# EAGLE board sampahSIM (EAGLE 7.1.0)
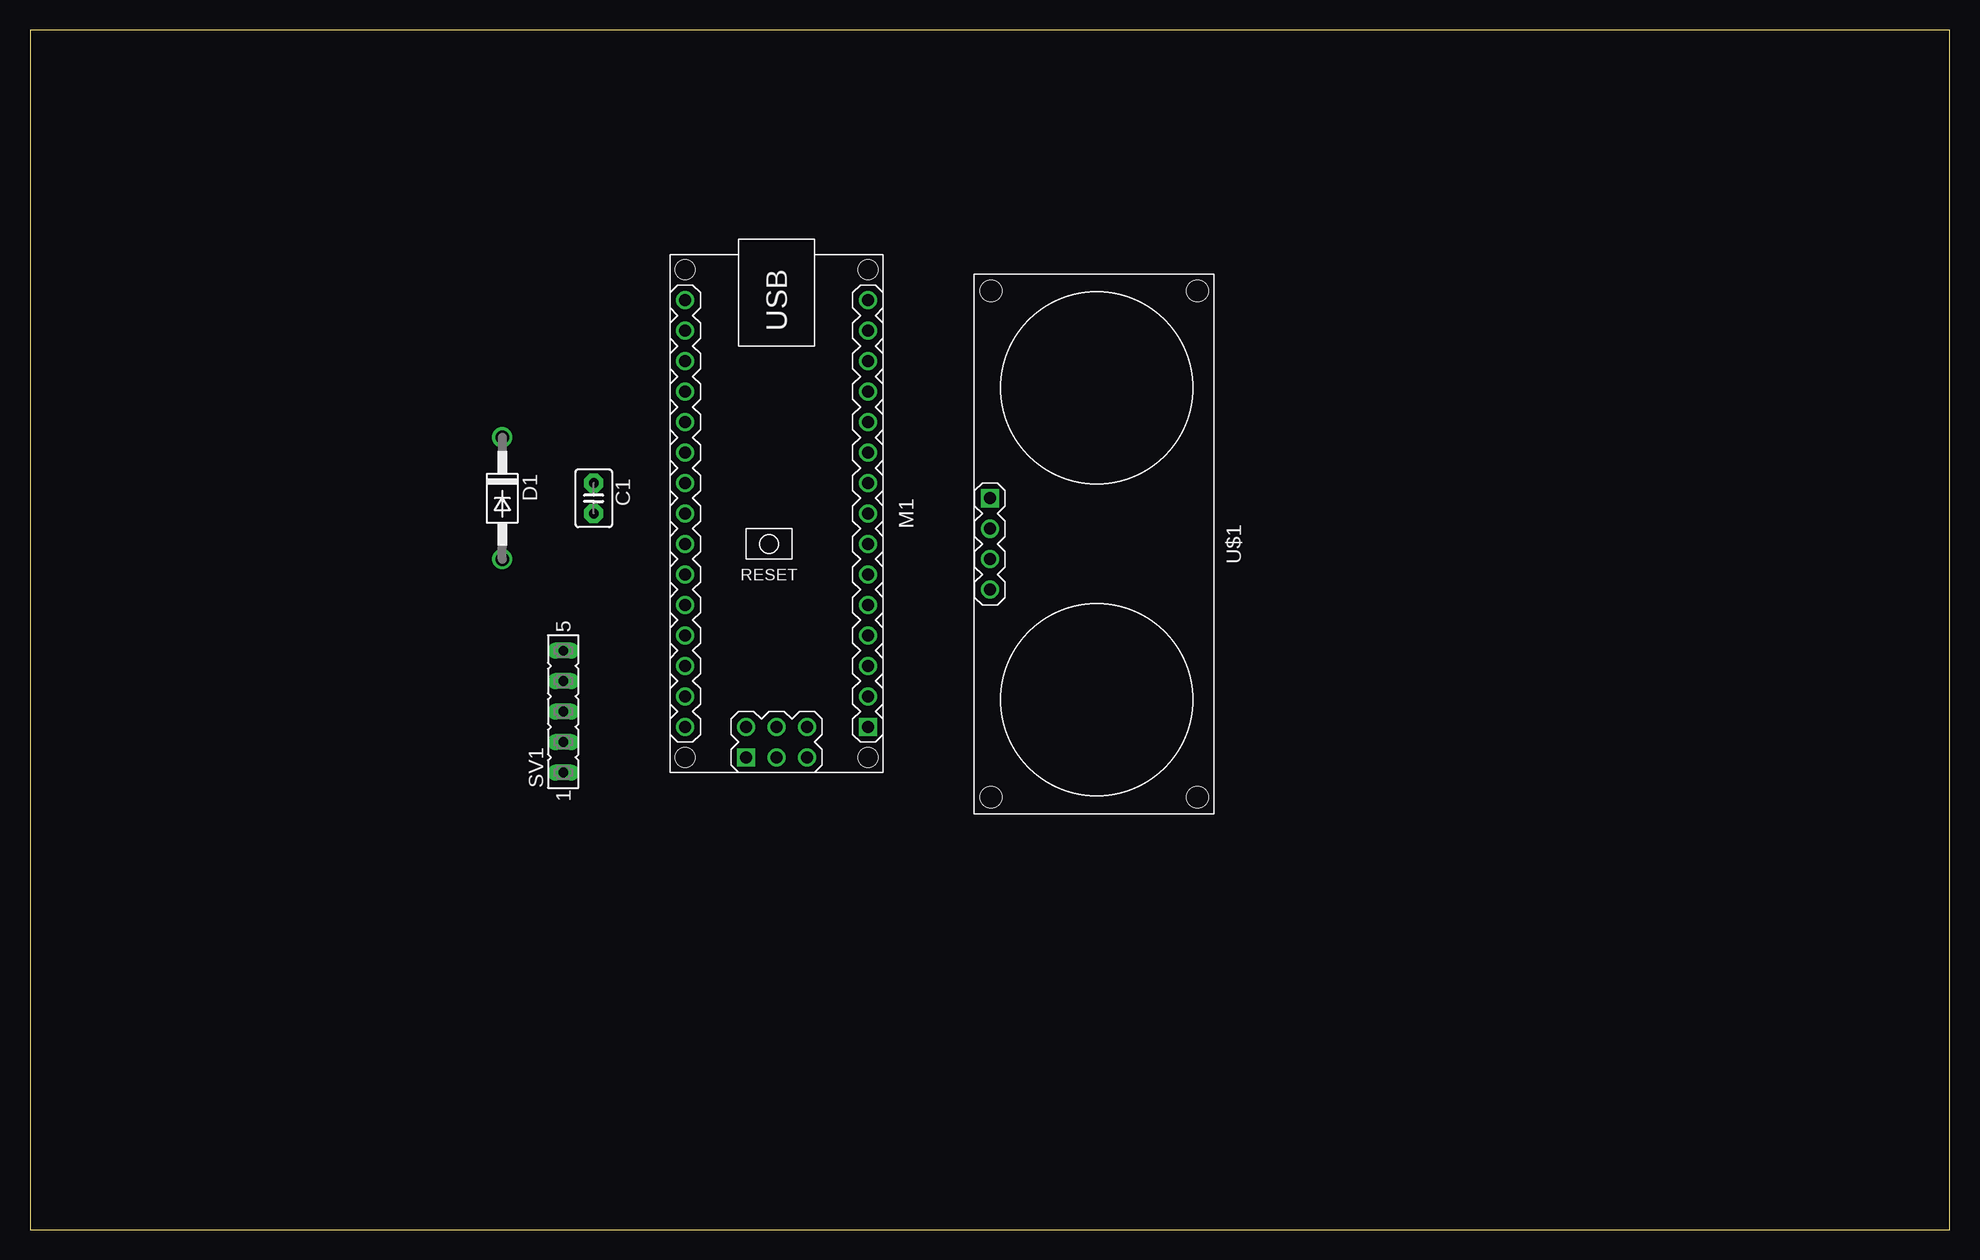
[diagram p0: board, top side]
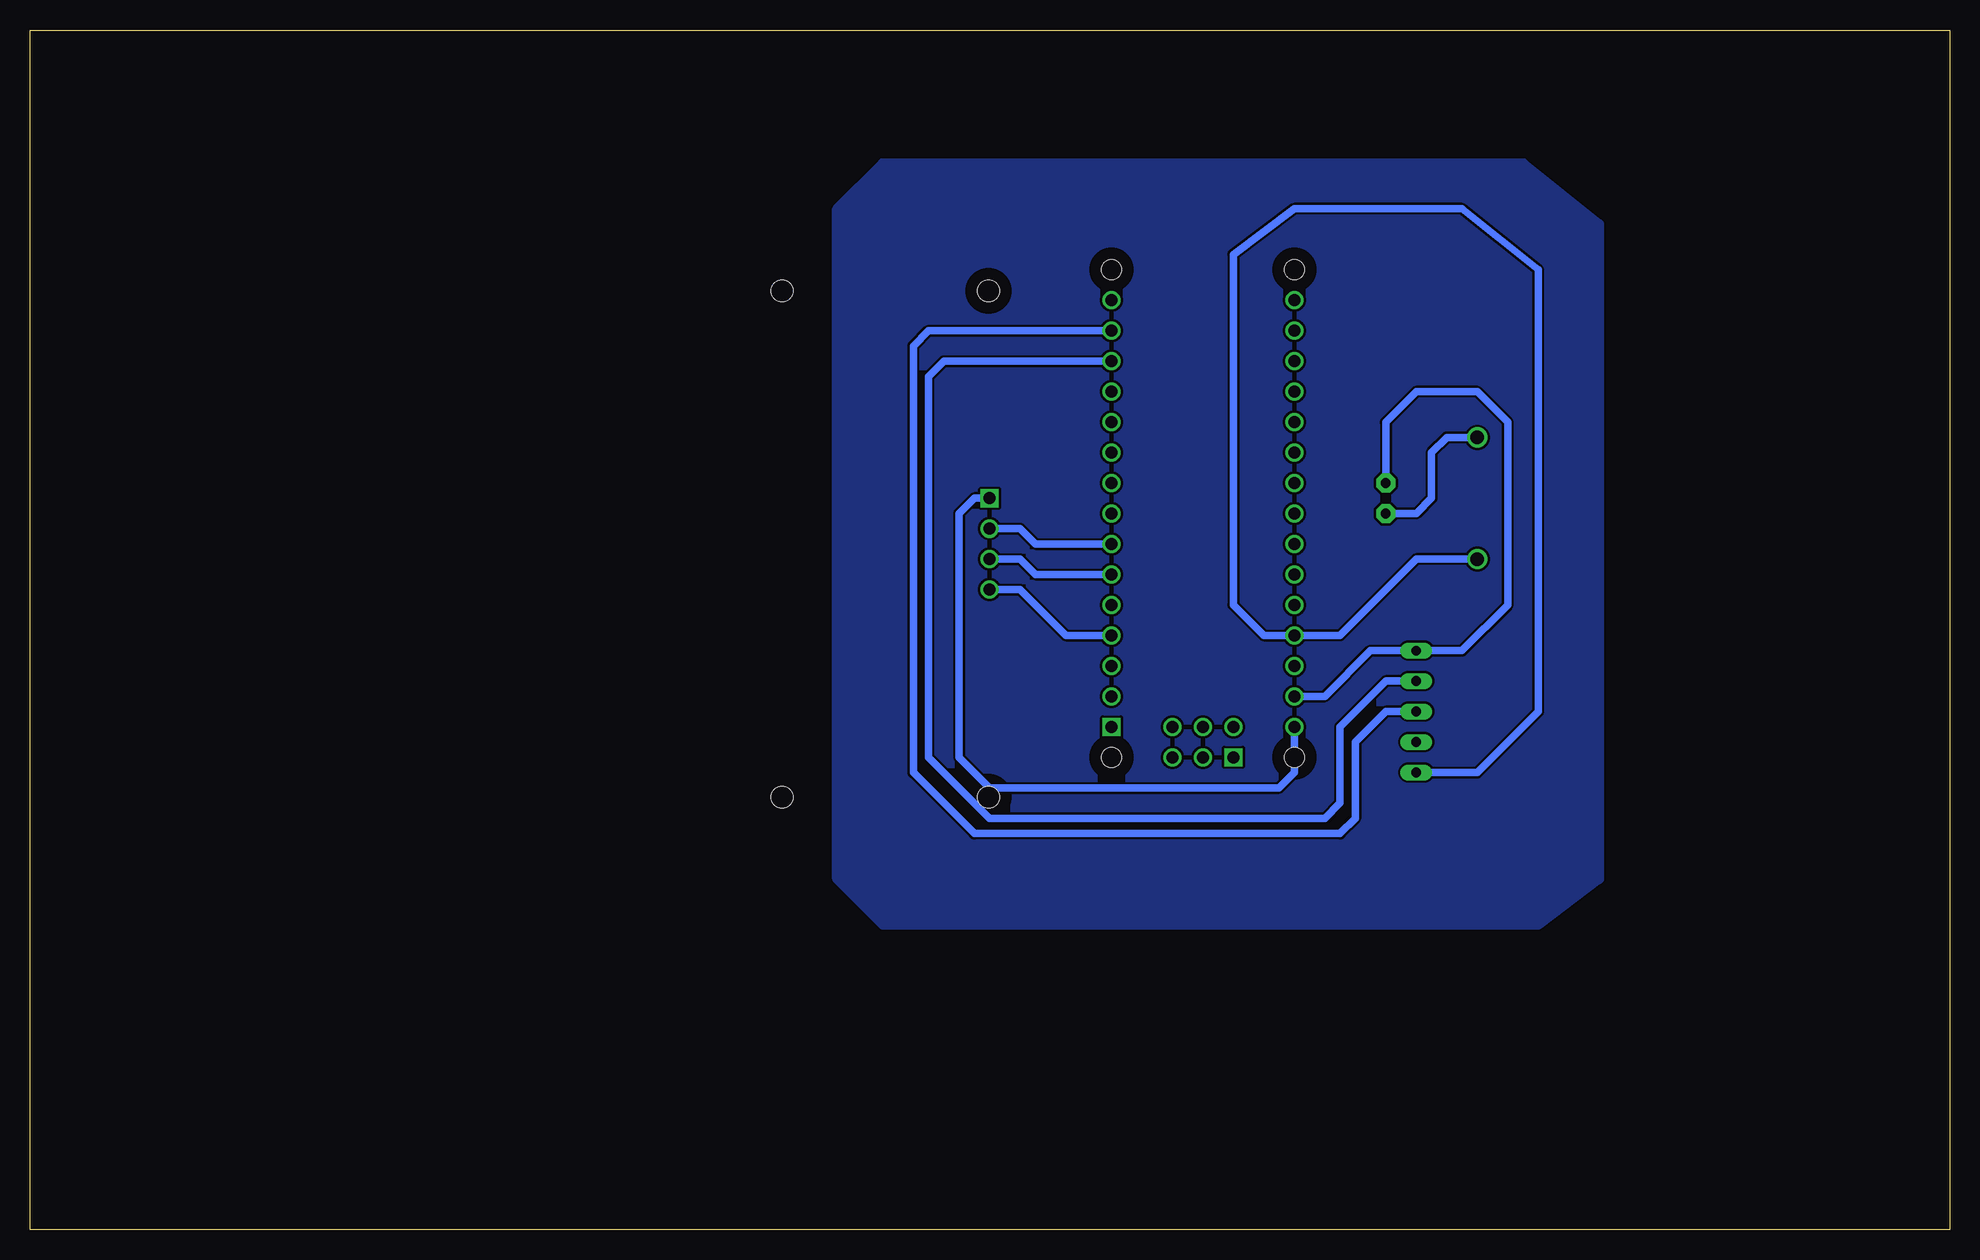
[diagram p1: board, bottom side, seen from below]

Size 160 x 100 mm. Coordinates in mm from the lower left corner, seen from the top.
Outline: 0,0 160,0 160,100 0,100 0,0
Copper layers (1*16): Top 0.035mm / dielectric 1.5mm / Bottom 0.035mm
Design rules "default": minimum track width 10mil, minimum drill 24mil, track to track 8mil, track to pad 8mil, pad to pad 8mil, via to via 8mil, smd to smd 8mil, copper to edge 40mil, drill to drill 8mil, minimum pad ring 10mil, minimum via ring 8mil, stop-mask expansion 4mil, vias tented up to drill 0mil, thermal gap 10mil

## Footprints (pad centres in the part's own frame; a part is rotated, then mirrored left to right if it is on the bottom)
C2.5-3 = drill 0.813 pad 1.6 octagon: 1 -1.27,0; 2 1.27,0
DO41-10 = drill 1.118: A 5.08,0; C -5.08,0
ARDUINO-NANO-3.0#ISP = drill 1 square: J1.1 17.78,7.62; J4.1 20.32,-2.54 | drill 1: J1.2 15.24,7.62; J1.3 12.7,7.62; J1.4 10.16,7.62; J1.5 7.62,7.62; J1.6 5.08,7.62; J1.7 2.54,7.62; J1.8 0,7.62; J1.9 -2.54,7.62; J1.10 -5.08,7.62; J1.11 -7.62,7.62; J1.12 -10.16,7.62; J1.13 -12.7,7.62; J1.14 -15.24,7.62; J1.15 -17.78,7.62; J2.1 17.78,-7.62; J2.2 15.24,-7.62; J2.3 12.7,-7.62; J2.4 10.16,-7.62; J2.5 7.62,-7.62; J2.6 5.08,-7.62; J2.7 2.54,-7.62; J2.8 0,-7.62; J2.9 -2.54,-7.62; J2.10 -5.08,-7.62; J2.11 -7.62,-7.62; J2.12 -10.16,-7.62; J2.13 -12.7,-7.62; J2.14 -15.24,-7.62; J2.15 -17.78,-7.62; J4.2 17.78,-2.54; J4.3 20.32,0; J4.4 17.78,0; J4.5 20.32,2.54; J4.6 17.78,2.54 | hole 1.651: -20.32,7.62; -20.32,-7.62; 20.32,-7.62; 20.32,7.62
FE05-1 = drill 0.813 long: 1 -5.08,0; 2 -2.54,0; 3 0,0; 4 2.54,0; 5 5.08,0
ULTRASONIC-HC-SR04 = drill 1 square: 1 -3.81,-8.89 | drill 1: 2 -1.27,-8.89; 3 1.27,-8.89; 4 3.81,-8.89 | hole 1.8: -21.1,8.4; -21.1,-8.8; 21.1,-8.8; 21.1,8.4

## Placement (x,y rotation side)
C1  [C2.5-3]  46.99,60.96 270 top
D1  1N4004  [DO41-10]  39.37,60.96 270 top
M1  ARDUINO-NANO-3.0#ISP  [ARDUINO-NANO-3.0#ISP]  62.23,59.69 270 top
SV1  [FE05-1]  44.45,43.18 90 top
U$1  ULTRASONIC-HC-SR04  [ULTRASONIC-HC-SR04]  88.9,57.15 270 top

## Library data of the parts
C1 = capacitor-wima
D1 = diode
M1 U$1 = diy-modules (1)
SV1 = con-lsta; OC_FARNELL: unknown; OC_NEWARK: unknown

## Nets
3V3: M1.J2.14
N$1: C1.2 D1.C
N$2: C1.1 M1.J2.2 SV1.5
N$3: M1.J1.13 SV1.4
N$5: M1.J1.14 SV1.3
N$6: D1.A M1.J2.4 SV1.1
N$7: M1.J2.1 U$1.1
N$8: M1.J1.7 U$1.2
N$9: M1.J1.6 U$1.3
N$10: M1.J1.4 U$1.4

## Tracks (layer width: path | path; a pad name or v marks a point on that pad's centre or on a via)
N$1
  Bottom 0.61: D1.C 41.91,66.04 43.18,64.77 43.18,60.96 44.45,59.69 C1.2
N$2
  Bottom 0.61: C1.1 46.99,67.31 44.45,69.85 39.37,69.85 36.83,67.31 36.83,52.07 40.64,48.26 SV1.5 48.26,48.26 52.07,44.45 M1.J2.2
N$3
  Bottom 0.61: SV1.4 46.99,45.72 50.8,41.91 50.8,35.56 52.07,34.29 80.01,34.29 85.09,39.37 85.09,71.12 83.82,72.39 M1.J1.13
N$4
  pour Bottom: 35.56,88.9 29.21,83.82 29.21,29.21 34.29,25.4 88.9,25.4 92.71,29.21 92.71,85.09 88.9,88.9
N$5
  Bottom 0.61: SV1.3 46.99,43.18 49.53,40.64 49.53,34.29 50.8,33.02 81.28,33.02 86.36,38.1 86.36,73.66 85.09,74.93 M1.J1.14
N$6
  Bottom 0.61: D1.A 44.45,55.88 50.8,49.53 M1.J2.4 57.15,49.53 59.69,52.07 59.69,81.28 54.61,85.09 40.64,85.09 34.29,80.01 34.29,43.18 39.37,38.1 SV1.1
N$7
  Bottom 0.61: U$1.1 81.28,60.96 82.55,59.69 82.55,39.37 80.01,36.83 55.88,36.83 54.61,38.1 M1.J2.1
N$8
  Bottom 0.61: U$1.2 77.47,58.42 76.2,57.15 M1.J1.7
N$9
  Bottom 0.61: U$1.3 77.47,55.88 76.2,54.61 M1.J1.6
N$10
  Bottom 0.61: U$1.4 77.47,53.34 73.66,49.53 M1.J1.4